# Altium PCB A.PcbDoc (part 1 of 3)
Units mm, origin at the board's own origin, x right, y up, seen from the top; angles counter-clockwise.
Board outline 93 x 60 mm, 2 copper layers (Top Layer, Bottom Layer); 76 components, 75 nets, 446 pads, 247 vias.
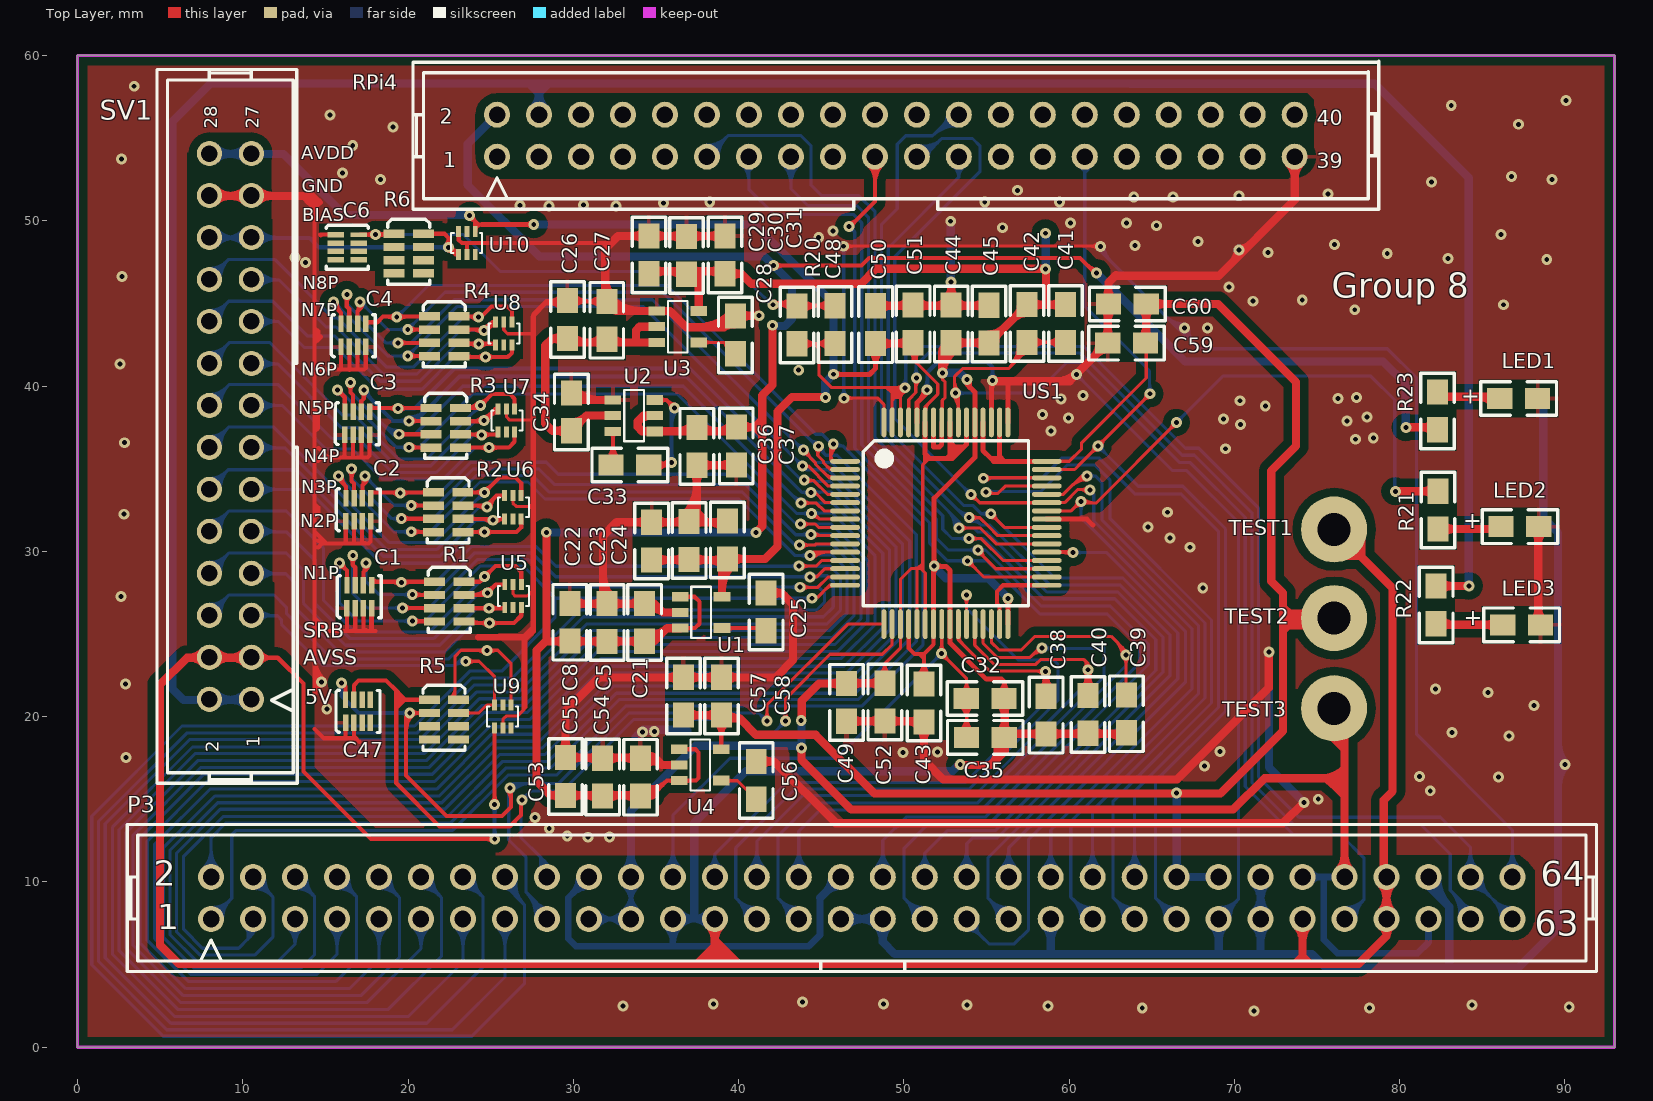
[diagram p0: Top Layer view]
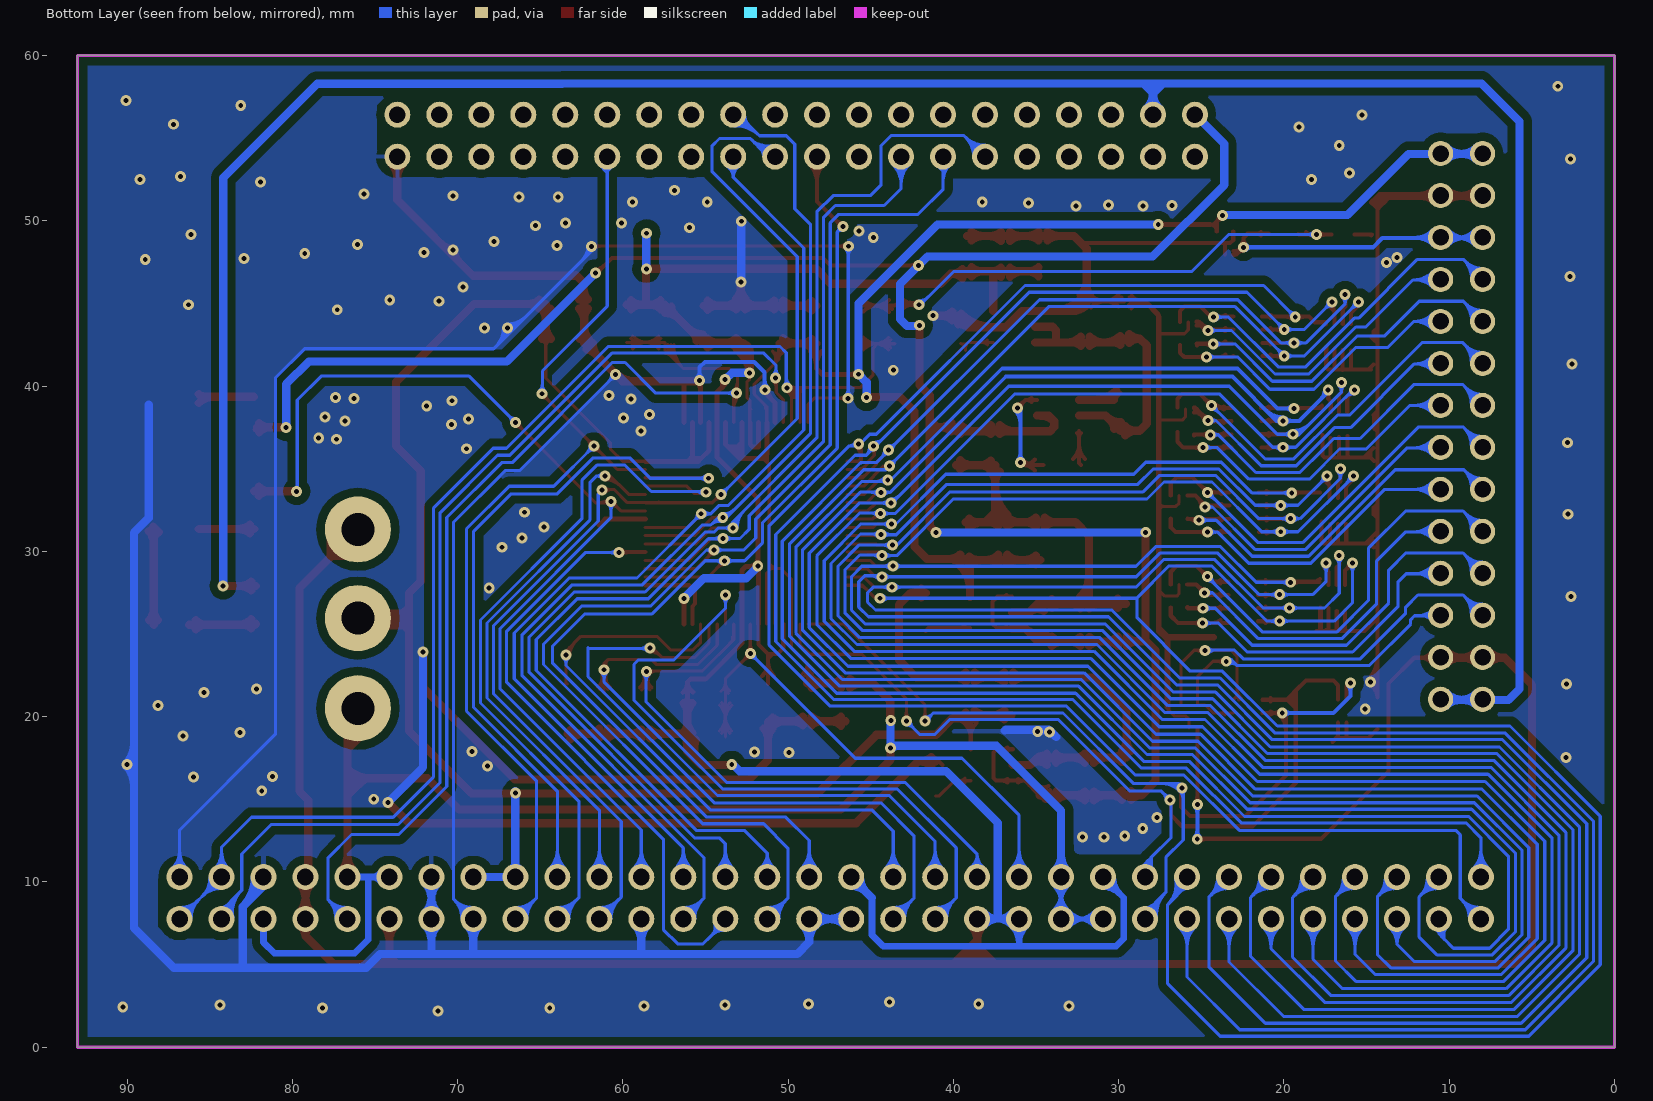
[diagram p1: Bottom Layer view, seen from below]

## Layer stack, top to bottom
Top Layer: signal copper 0.0356
Dielectric: dielectric 0.32, FR-4, Dk 4.8
Bottom Layer: signal copper 0.0356

## Board outline
0,0 93,0 93,60 0,60

## Design rules (kind name [scope] priority, off if disabled: settings)
Clearance Clearance_1 [inpolygon] p1: gap=0.5
Clearance [All] p2: gap=0.15
MinimumSolderMaskSliver [All] p1: minsoldermaskwidth=0.01
PolygonConnect PolygonConnect_1 [isvia] p1: connectstyle=Direct reliefconductorwidth=0.254 reliefentries=4 polygonreliefangle="90 Angle"
PolygonConnect [All] p2: connectstyle=Relief reliefconductorwidth=0.254 reliefentries=4 polygonreliefangle="90 Angle"
RoutingVias [All] p1: holewidth=0.3 width=0.66 viastyle="Through Hole" minholewidth=0.3 minwidth=0.66 maxholewidth=0.3 maxwidth=0.66
SilkToSilkClearance [All] p1: silktosilkclearance=0.01
SilkscreenOverComponentPads [All] p1: minsilkscreentomaskgap=0.01
SolderMaskExpansion [All] p1: expansion=0.102
Width [All] p1: maxlimit=1 minlimit=0.15 preferedwidth=0.254 minimp=50.000000 maximp=50.000000 favimp=50.000000
25 further rules are at their usual default settings.

## Components (designator, comment, footprint, x,y, rotation, side; value= is the part's Value field where it differs from the comment)
C1 "" "0805 ARRAY" 17.054,27.258 r270 top
C2 "" "0805 ARRAY" 16.988,32.516 r270 top locked
C3 "" "0805 ARRAY" 16.924,37.738 r270 top locked
C4 "" "0805 ARRAY" 16.695,43.062 r270 top
C5 "10uf" 0805 32.049,25.69 r90 top
C6 "" "0805 ARRAY" 16.329,48.401 r180 top
C8 "10uf" 0805 29.793,25.707 r90 top
C21 "1uf" 0805 34.321,25.698 r90 top
C22 "10uf" 0805 34.741,30.615 r90 top
C23 "2.2uf" 0805 37.011,30.655 r90 top
C24 "1uf" 0805 39.32,30.681 r90 top
C25 "1uf" 0805 41.671,26.333 r90 top
C26 "10uf" 0805 29.642,44.021 r90 top
C27 "2.2uf" 0805 32.026,43.977 r90 top
C28 "0.01uf" 0805 39.802,43.093 r90 top
C29 "10uf" 0805 34.574,47.935 r90 top
C30 "2.2uf" 0805 36.854,47.905 r90 top
C31 "1uf" 0805 39.179,47.935 r90 top
C32 "10uf" 0805 54.917,21.086 r0 top
C33 "10uf" 0805 33.419,35.218 r180 top
C34 "10uf" 0805 29.883,38.432 r90 top
C35 "0.1uf" 0805 54.927,18.743 r180 top
C36 "10uf" 0805 37.473,36.353 r270 top
C37 "1uf" 0805 39.861,36.372 r270 top
C38 "0.1uf" 0805 58.613,20.085 r270 top
C39 "1uf" 0805 63.459,20.168 r270 top
C40 "0.1uf" 0805 61.15,20.133 r270 top
C41 "0.1uf" 0805 59.783,43.78 r90 top
C42 "1uf" 0805 57.445,43.78 r90 top
C43 "0.1uf" 0805 51.212,20.82 r270 top
C44 "1uf" 0805 52.867,43.757 r90 top
C45 "0.1uf" 0805 55.146,43.745 r90 top
C47 "" "0805 ARRAY" 16.979,20.323 r270 top
C48 "1.5nF" 0805 45.833,43.718 r270 top
C49 "0.1uf" 0805 46.526,20.861 r270 top
C50 "1uf" 0805 48.295,43.709 r90 top
C51 "0.1uf" 0805 50.565,43.759 r90 top
C52 "1uf" 0805 48.85,20.873 r270 top
C53 "10uf" 0805 34.071,16.33 r90 top
C54 "10uf" 0805 31.779,16.337 r90 top
C55 "1uf" 0805 29.53,16.375 r90 top
C56 "1uf" 0805 41.07,16.139 r90 top
C57 "10uf" 0805 36.661,21.237 r90 top
C58 "2.2uf" 0805 38.975,21.237 r90 top
C59 "0.1uf" 0805 63.477,42.591 r0 top
C60 "1uf" 0805 63.521,44.958 r180 top
LED1 "" 0805 87.201,39.24 r0 top
LED2 "" 0805 87.273,31.489 r0 top
LED3 "" 0805 87.38,25.553 r0 top
P3 "64" 64 47.455,9.022 r0 top locked
R1 "" 8P4R 22.486,26.955 r180 top locked
R2 "" 8P4R 22.423,32.362 r180 top locked
R3 "" 8P4R 22.284,37.472 r180 top
R4 "" 8P4R 22.184,43.009 r180 top locked
R5 "" 8P4R 22.179,19.815 r180 top
R6 "" 8P4R 20.037,48.011 r180 top
R20 "1M" 0805 43.533,43.7 r90 top
R21 "10K" 0805 82.31,32.494 r90 top
R22 "10K" 0805 82.207,26.756 r90 top
R23 "10K" 0805 82.28,38.495 r270 top
RPi4 "RP13" 40 49.516,55.146 r0 top locked
SV1 "SV1" 26 9.254,38.827 r0 top locked
TEST1 "TEST2" P 76.036,31.322 r90 top
TEST2 "TEST3" P 76.036,25.957 r90 top
TEST3 "TEST4" P 76.036,20.501 r90 top
U1 "TPS73225DBVT" sot23-5 37.728,26.302 r0 top
U2 "LM2664M6" sot23-6 33.672,38.209 r0 top
U3 "TPS72325DBVT" sot23-5 36.318,43.589 r0 top
U4 "TPS73233DBVT" sot23-5 37.679,17.071 r0 top
U5 "TPD4E1B06DRLR" SOT563 26.353,27.298 r270 top
U6 "TPD4E1B06DRLR" SOT563 26.347,32.665 r270 top
U7 "TPD4E1B06DRLR" SOT563 25.955,37.916 r270 top
U8 "TPD4E1B06DRLR" SOT563 25.792,43.171 r270 top
U9 "TPD4E1B06DRLR" SOT563 25.739,20 r90 top
U10 "TPD4E1B06DRLR" SOT563 23.567,48.656 r90 top
US1 "LQFP64" TQFP64 52.543,31.696 r0 top locked (schematic designator US2)

## Footprints (in the part's own frame and the unit in brackets; to place one, negate y for a bottom-side part, rotate by r counter-clockwise, add the part's x,y. Pads: shape width x height; smd on the part's side, far side on the other; paste and mask are expansions set on the pad)
8P4R [mil]
  rect 50x20 smd: 1(-35,-47.24) 2(-35,-15.75) 3(-35,15.75) 4(-35,47.24) 5(35,47.24) 6(35,15.75) 7(35,-15.75) 8(35,-47.24)
  silkscreen extent -50,-82 50,73
26 [mil]
  round 60 hole 39.37: 0-1(-50,-700) 0-2(50,-700) 1(50,-600) 2(-50,-600) 3(50,-500) 4(-50,-500) 5(50,-400) 6(-50,-400) 7(50,-300) 8(-50,-300) 9(50,-200) 10(-50,-200) 11(50,-100) 12(-50,-100) 13(50,0) 14(-50,0) 15(50,100) 16(-50,100) 17(50,200) 18(-50,200) 19(50,300) 20(-50,300) 21(50,400) 22(-50,400) 23(50,500) 24(-50,500) 25(50,600) 26(-50,600)
  silkscreen extent -175,-900 159,800
40 [mil]
  round 62 hole 39.37: 1(-950,-50) 2(-950,50) 3(-850,-50) 4(-850,50) 5(-750,-50) 6(-750,50) 7(-650,-50) 8(-650,50) 9(-550,-50) 10(-550,50) 11(-450,-50) 12(-450,50) 13(-350,-50) 14(-350,50) 15(-250,-50) 16(-250,50) 17(-150,-50) 18(-150,50) 19(-50,-50) 20(-50,50) 21(50,-50) 22(50,50) 23(150,-50) 24(150,50) 25(250,-50) 26(250,50) 27(350,-50) 28(350,50) 29(450,-50) 30(450,50) 31(550,-50) 32(550,50) 33(650,-50) 34(650,50) 35(750,-50) 36(750,50) 37(850,-50) 38(850,50) 39(950,-50) 40(950,50)
  silkscreen extent -1150,-175 1150,177
64 [mil]
  round 62 hole 39.37: 1(-1550,-50) 2(-1550,50) 3(-1450,-50) 4(-1450,50) 5(-1350,-50) 6(-1350,50) 7(-1250,-50) 8(-1250,50) 9(-1150,-50) 10(-1150,50) 11(-1050,-50) 12(-1050,50) 13(-950,-50) 14(-950,50) 15(-850,-50) 16(-850,50) 17(-750,-50) 18(-750,50) 19(-650,-50) 20(-650,50) 21(-550,-50) 22(-550,50) 23(-450,-50) 24(-450,50) 25(-350,-50) 26(-350,50) 27(-250,-50) 28(-250,50) 29(-150,-50) 30(-150,50) 31(-50,-50) 32(-50,50) 33(50,-50) 34(50,50) 35(150,-50) 36(150,50) 37(250,-50) 38(250,50) 39(350,-50) 40(350,50) 41(450,-50) 42(450,50) 43(550,-50) 44(550,50) 45(650,-50) 46(650,50) 47(750,-50) 48(750,50) 49(850,-50) 50(850,50) 51(950,-50) 52(950,50) 53(1050,-50) 54(1050,50) 55(1150,-50) 56(1150,50) 57(1250,-50) 58(1250,50) 59(1350,-50) 60(1350,50) 61(1450,-50) 62(1450,50) 63(1550,-50) 64(1550,50)
  silkscreen extent -1750,-175 1750,175
0805 [mil]
  rect 60x50 smd: 1(-45,0) 2(45,0)
  silkscreen extent -90,-40 90,40
"0805 ARRAY" [mm]
  rect 1x0.3 smd: 1(-0.7,-0.75)
  rect 1x0.33 smd: 2(-0.7,-0.25) 3(-0.7,0.25) 4(-0.7,0.75) 5(0.7,0.75) 6(0.7,0.25) 7(0.7,-0.25) 8(0.7,-0.75)
  silkscreen extent -1.26,-1.33 1.28,1.33
P [mm]
  round 4 hole 2 mask+0.3: 1(0,0)
sot23-5 [mm]
  rect 1x0.55 smd: 1(-1.27,0.95) 2(-1.27,0) 3(-1.27,-0.95)
  rect 1x0.6 smd: 4(1.27,-0.95) 5(1.27,0.95)
  silkscreen extent -0.59,-1.55 0.6,1.55
sot23-6 [mm]
  rect 1x0.55 smd: 1(-1.27,0.95) 2(-1.27,0) 3(-1.27,-0.95) 5(1.27,0)
  rect 1x0.6 smd: 4(1.27,-0.95) 6(1.27,0.95)
  silkscreen extent -0.59,-1.55 0.6,1.55
SOT563 [mm]
  rect 0.67x0.3 smd: 1(-0.7,0.5) 2(-0.7,0) 3(-0.7,-0.5) 4(0.7,-0.5) 5(0.7,0) 6(0.7,0.5)
  silkscreen extent -0.6,-0.91 0.6,0.96
TQFP64 [mm]
  oval 1.8x0.3 smd mask+0.05: 1(-6.1,3.75) 2(-6.1,3.25) 3(-6.1,2.75) 4(-6.1,2.25) 5(-6.1,1.75) 6(-6.1,1.25) 7(-6.1,0.75) 8(-6.1,0.25) 9(-6.1,-0.25) 10(-6.1,-0.75) 11(-6.1,-1.25) 12(-6.1,-1.75) 13(-6.1,-2.25) 14(-6.1,-2.75) 15(-6.1,-3.25) 16(-6.1,-3.75) 33(6.1,-3.75) 34(6.1,-3.25) 35(6.1,-2.75) 36(6.1,-2.25) 37(6.1,-1.75) 38(6.1,-1.25) 39(6.1,-0.75) 40(6.1,-0.25) 41(6.1,0.25) 42(6.1,0.75) 43(6.1,1.25) 44(6.1,1.75) 45(6.1,2.25) 46(6.1,2.75) 47(6.1,3.25) 48(6.1,3.75)
  oval 0.3x1.8 smd mask+0.05: 17(-3.75,-6.1) 18(-3.25,-6.1) 19(-2.75,-6.1) 20(-2.25,-6.1) 21(-1.75,-6.1) 22(-1.25,-6.1) 23(-0.75,-6.1) 24(-0.25,-6.1) 25(0.25,-6.1) 26(0.75,-6.1) 27(1.25,-6.1) 28(1.75,-6.1) 29(2.25,-6.1) 30(2.75,-6.1) 31(3.25,-6.1) 32(3.75,-6.1) 49(3.75,6.1) 50(3.25,6.1) 51(2.75,6.1) 52(2.25,6.1) 53(1.75,6.1) 54(1.25,6.1) 55(0.75,6.1) 56(0.25,6.1) 57(-0.25,6.1) 58(-0.75,6.1) 59(-1.25,6.1) 60(-1.75,6.1) 61(-2.25,6.1) 62(-2.75,6.1) 63(-3.25,6.1) 64(-3.75,6.1)
  silkscreen extent -5,-5 5,5

## Part data
C1 C2 C3 C4 C6 C47 R1 R2 R3 R4 R5 R6: library part 8P4R
C5 C8 C21 C22 C23 C24 C25 C26 C27 C28 C29 C30 C31 C32 C33 C34 C35 C36 C37 C38 C39 C40 C41 C42 C43 C44 C45 C48 C49 C50 C51 C52 C53 C54 C55 C56 C57 C58 C59 C60: library part CAP, "Capacitor"
LED1 LED2 LED3: library part LED
R20 R21 R22 R23: library part RES1
RPi4: library part 40
SV1: library part 26
TEST1 TEST2 TEST3: library part CON1, "Connector"
U1 U3 U4: library part 5
U2: library part 6
U5 U6 U7 U8 U9 U10: library part 6+

## Via types
v1: diameter 0.66, hole 0.3, Top Layer to Bottom Layer, tented both sides, 247 vias

## Nets (pads, with @x,y where several pads share a name; then routed paths per layer and width w, separated by ;. In a path a pad name is that pad's centre, name@x,y a point inside that pad or via, vN(x,y) a via of type N, cw(c..) or ccw(c..) an arc to the next point about the centre after c; other vN are vias at no path point)
1N: R1.3 SV1.6 U5.4 | length 32.5
  Top Layer w0.25: R1.3@23.375,26.555 v1(24.906,26.555) U5.4@25.81,26.555 ; R1.3@23.847,26.464 cw(c24.067,26.243) 24.067,26.555 cw(c24.067,26.866) R1.3@23.847,26.646 ; v1@24.761,26.41 ccw(c24.411,26.06) 24.411,26.555 ccw(c24.411,27.05) v1@24.761,26.7 ; v1@25.051,26.41 cw(c25.401,26.06) 25.401,26.555 cw(c25.401,27.05) v1@25.051,26.7 ; 25.689,26.555 ccw(c25.689,26.762) U5.4@25.836,26.616 ; U5.4@25.799,26.544 U5.4@25.81,26.555 ; U5.4@25.817,26.555 U5.4@25.81,26.555 ; U5.4@25.853,26.598 U5.4@25.81,26.555
  Bottom Layer w0.19: SV1.6@7.903,28.638 9.161,29.895 12.629,29.895 13.671,28.853 13.671,26.86 16.215,24.316 21.924,24.316 24.163,26.555 v1(24.906,26.555) ; SV1.6@7.984,29.144 ccw(c7.984,30.17) 8.71,29.444 ; SV1.6@7.984,29.334 ccw(c7.984,30.819) 9.034,29.769 ; SV1.6@8.271,28.667 cw(c9.089,28.667) 8.511,29.245 ; SV1.6@8.461,28.667 cw(c9.738,28.667) 8.835,29.569 ; SV1.6@8.651,28.667 cw(c10.387,28.667) 9.16,29.894 ; v1@24.74,26.389 ccw(c24.339,25.988) 24.339,26.555 ccw(c24.339,27.122) v1@24.74,26.721
1P: R1.4 SV1.5 U5.6 | length 30.1
  Top Layer w0.25: R1.4@23.381,25.666 26.421,25.666 26.853,26.098 U5.6@26.853,26.598 ; R1.4@23.847,25.846 ccw(c24.281,26.28) 24.281,25.666 ; 24.401,25.666 cw(c24.401,25.121) v1@24.786,25.507 ; 24.472,25.666 ccw(c24.472,26.111) v1@24.786,25.797 ; v1@25.076,25.507 cw(c25.461,25.121) 25.461,25.666 ; v1@25.076,25.797 ccw(c25.391,26.111) 25.391,25.666
  Bottom Layer w0.19: SV1.5@10.443,28.638 12.6,28.638 13.108,28.13 13.108,26.646 15.845,23.909 22.219,23.909 23.962,25.652 v1(24.931,25.652) ; SV1.5@10.727,28.87 ccw(c11.287,29.429) 11.287,28.638 ; SV1.5@10.862,28.329 cw(c11.606,27.585) 11.606,28.638 ; SV1.5@10.862,29.004 ccw(c11.746,29.888) 11.746,28.638 ; SV1.5@10.996,28.195 cw(c12.065,27.126) 12.065,28.638 ; SV1.5@10.996,29.138 ccw(c12.204,30.347) 12.204,28.638 ; v1@24.765,25.485 ccw(c24.364,25.084) 24.364,25.652 ccw(c24.364,26.219) v1@24.765,25.818
2N: R1.1 SV1.8 U5.1 | length 36.1
  Top Layer w0.25: R1.1@23.375,28.155 24.326,28.155 ; R1.1@23.847,28.064 cw(c24.067,27.843) 24.067,28.155 cw(c24.067,28.466) R1.1@23.847,28.246 ; v1@24.43,28.444 cw(c24.071,28.41) 24.326,28.155 ; v1@24.615,28.259 ccw(c24.581,27.9) 24.326,28.155 ; v1@24.634,28.668 ccw(c24.634,29.163) 24.984,28.813 ccw(c25.334,28.463) v1@24.839,28.463 ; U5.1@26.853,27.998 26.853,28.756 26.496,29.113 25.284,29.113 v1(24.634,28.463) 24.326,28.155
  Bottom Layer w0.19: SV1.8@7.903,31.178 9.163,32.437 12.643,32.437 14.876,30.204 14.876,27.052 16.818,25.111 21.282,25.111 v1(24.634,28.463) ; SV1.8@7.984,31.684 ccw(c7.984,32.71) 8.71,31.984 ; SV1.8@7.984,31.874 ccw(c7.984,33.359) 9.034,32.309 ; SV1.8@8.271,31.207 cw(c9.089,31.207) 8.511,31.785 ; SV1.8@8.461,31.207 cw(c9.738,31.207) 8.835,32.109 ; SV1.8@8.651,31.207 cw(c10.387,31.207) 9.16,32.434 ; v1@24.399,28.463 cw(c23.831,28.463) 24.233,28.062 cw(c24.634,27.661) v1@24.634,28.228
2P: R1.2 SV1.7 U5.3 | length 30.1
  Top Layer w0.25: R1.2@23.375,27.355 24.665,27.355 v1(24.799,27.489) 25.308,27.998 U5.3@25.853,27.998 ; R1.2@23.847,27.264 cw(c24.067,27.043) 24.067,27.355 cw(c24.067,27.666) R1.2@23.847,27.446 ; R1.2@23.98,27.355 ccw(c23.98,28.309) v1@24.654,27.634 ; v1@24.799,27.694 ccw(c24.799,28.189) 25.149,27.839 ccw(c25.499,27.489) v1@25.004,27.489
  Bottom Layer w0.19: SV1.7@10.443,31.178 12.637,31.178 14.398,29.417 14.398,26.827 16.508,24.717 21.552,24.717 24.324,27.489 ; SV1.7@10.727,31.41 ccw(c11.287,31.969) 11.287,31.178 ; SV1.7@10.862,30.869 cw(c11.606,30.125) 11.606,31.178 ; SV1.7@10.862,31.544 ccw(c11.746,32.428) 11.746,31.178 ; SV1.7@10.996,30.735 cw(c12.065,29.666) 12.065,31.178 ; SV1.7@10.996,31.678 ccw(c12.204,32.887) 12.204,31.178 ; v1@24.612,27.347 ccw(c24.324,27.126) 24.324,27.489 ; v1@24.612,27.632 cw(c24.324,27.852) 24.324,27.489 ; v1(24.799,27.489) 24.324,27.489
3N: R2.3 SV1.10 U6.4 | length 30.2
  Top Layer w0.25: R2.3@23.312,31.962 25.844,31.962 U6.4@25.847,31.965 ; R2.3@23.784,31.871 cw(c24.005,31.651) 24.005,31.962 cw(c24.005,32.274) R2.3@23.784,32.053 ; 24.439,31.962 cw(c24.439,31.184) v1@24.989,31.734 ; v1@25.279,31.734 cw(c25.829,31.184) U6.4@25.829,31.962
  Bottom Layer w0.19: SV1.10@7.903,33.718 9.117,34.932 13.276,34.932 18.51,29.698 21.923,29.698 24.105,31.879 v1(25.134,31.879) ; SV1.10@7.984,34.224 ccw(c7.984,35.25) 8.71,34.524 ; SV1.10@7.984,34.414 ccw(c7.984,35.899) 9.034,34.849 ; SV1.10@8.461,33.759 cw(c9.634,33.789) 8.804,34.619 ; SV1.10@8.651,33.764 cw(c10.244,33.805) 9.117,34.932 ; v1@24.968,31.713 ccw(c24.567,31.312) 24.567,31.879 ccw(c24.567,32.447) v1@24.968,32.045
3P: R2.4 SV1.9 U6.6 | length 28.2
  Top Layer w0.25: R2.4@23.312,31.162 v1(24.632,31.162) 26.567,31.162 26.847,31.443 U6.6@26.847,31.965 ; R2.4@23.784,31.071 cw(c24.005,30.851) 24.005,31.162 cw(c24.005,31.474) R2.4@23.784,31.253 ; v1@24.487,31.017 ccw(c24.137,30.667) 24.137,31.162 ccw(c24.137,31.657) v1@24.487,31.307 ; v1@24.777,31.017 cw(c25.127,30.667) 25.127,31.162 cw(c25.127,31.657) v1@24.777,31.307
  Bottom Layer w0.19: SV1.9@10.524,33.747 13.903,33.747 18.372,29.278 22.133,29.278 24.017,31.162 v1(24.632,31.162) ; SV1.9@10.862,33.409 cw(c11.676,32.595) 11.676,33.747 cw(c11.676,34.898) SV1.9@10.862,34.084 ; SV1.9@10.996,33.275 cw(c12.135,32.136) 12.135,33.747 cw(c12.135,35.357) SV1.9@10.996,34.218 ; v1@24.466,30.996 ccw(c24.065,30.595) 24.065,31.162 ccw(c24.065,31.729) v1@24.466,31.328
4CSI: P3.39 RPi4.24 US1.39 | length 85.8
  Top Layer w0.19: v1@54.067,32.029 54.594,32.029 55.126,31.496 55.676,30.946 US1.39@58.643,30.946 ; v1@54.121,31.871 cw(c54.501,31.49) 54.501,32.029 ; v1@54.121,32.203 ccw(c54.543,32.625) 54.543,32.029
  Bottom Layer w0.19: 52.034,55.437 cw(c53.193,54.278) RPi4.24@53.295,55.914 ; 52.332,55.735 cw(c53.228,54.839) RPi4.24@53.306,56.104 ; 52.366,55.769 ccw(c51.719,56.416) RPi4.24@52.633,56.416 ; 52.629,56.033 cw(c53.263,55.4) RPi4.24@53.318,56.294 ; 53.186,32.591 ccw(c53.955,33.36) v1@53.955,32.272 ; RPi4.24@53.283,55.725 ccw(c53.158,53.717) 51.736,55.139 ; RPi4.24@53.326,56.416 53.012,56.416 51.736,55.139 ; 53.51,32.266 ccw(c53.955,32.711) v1@53.955,32.082 ; v1@53.963,31.993 cw(c54.062,31.472) 54.437,31.847 ; v1@53.999,31.806 cw(c54.143,31.045) 54.691,31.593 ; P3.39@55.652,7.752 ccw(c53.981,7.752) 55.163,8.934 ccw(c56.345,10.116) P3.39@56.345,8.445 ; P3.39@55.842,7.752 ccw(c54.63,7.752) 55.487,8.61 ccw(c56.345,9.468) P3.39@56.345,8.255 ; P3.39@56.345,7.752 55.091,9.006 55.091,11.459 66.093,22.461 66.093,24.947 63.07,27.97 58.818,27.97 55.196,31.593 54.691,31.593 ; 51.736,55.139 50.111,55.139 49.599,54.627 49.599,50.726 48.656,49.783 48.656,37.12 53.739,32.037 v1(53.955,32.037) 54.246,32.037 54.691,31.593
4N: R2.1 SV1.12 U6.1 | length 34.1
  Top Layer w0.25: R2.1@23.312,33.562 v1(24.62,33.562) 25.528,34.47 26.515,34.47 26.847,34.138 U6.1@26.847,33.365 ; R2.1@23.784,33.471 cw(c24.005,33.251) 24.005,33.562 cw(c24.005,33.874) R2.1@23.784,33.653 ; v1@24.475,33.417 ccw(c24.125,33.067) 24.125,33.562 ccw(c24.125,34.057) v1@24.475,33.707 ; v1@24.62,33.767 ccw(c24.62,34.262) 24.97,33.912 ccw(c25.32,33.562) v1@24.825,33.562
  Bottom Layer w0.19: SV1.12@7.903,36.258 9.173,37.527 11.856,37.527 13.849,35.534 18.846,30.538 21.596,30.538 v1(24.62,33.562) ; SV1.12@7.984,36.764 ccw(c7.984,37.79) 8.71,37.064 ; SV1.12@7.984,36.954 ccw(c7.984,38.439) 9.034,37.389 ; SV1.12@8.271,36.287 cw(c9.089,36.287) 8.511,36.865 ; SV1.12@8.461,36.287 cw(c9.738,36.287) 8.835,37.189 ; SV1.12@8.651,36.287 cw(c10.387,36.287) 9.16,37.514 ; v1@24.385,33.562 cw(c23.818,33.562) 24.219,33.161 cw(c24.62,32.76) v1@24.62,33.327
4P: R2.2 SV1.11 U6.3 | length 28
  Top Layer w0.25: R2.2@23.312,32.762 24.754,32.762 25.357,33.365 U6.3@25.847,33.365 ; R2.2@23.784,32.671 cw(c24.005,32.451) 24.005,32.762 cw(c24.005,33.074) R2.2@23.784,32.853 ; 24.106,32.762 cw(c24.106,31.998) v1@24.646,32.538 ; v1@24.996,32.683 cw(c25.771,32.683) 25.223,33.231
  Bottom Layer w0.19: SV1.11@10.443,36.258 12.539,36.258 14.532,34.265 18.679,30.118 21.759,30.118 24.325,32.683 ; SV1.11@10.727,36.49 ccw(c11.287,37.049) 11.287,36.258 ; SV1.11@10.862,35.949 cw(c11.606,35.205) 11.606,36.258 ; SV1.11@10.862,36.624 ccw(c11.746,37.508) 11.746,36.258 ; SV1.11@10.996,35.815 cw(c12.065,34.746) 12.065,36.258 ; SV1.11@10.996,36.758 ccw(c12.204,37.967) 12.204,36.258 ; v1@24.602,32.544 ccw(c24.325,32.339) 24.325,32.683 ; v1@24.602,32.823 cw(c24.325,33.028) 24.325,32.683 ; v1(24.791,32.683) 24.325,32.683
5N: R3.3 SV1.14 U7.4 | length 30.4
  Top Layer w0.25: R3.3@23.173,37.072 U7.4@25.456,37.072 ; R3.3@23.645,36.98 cw(c23.865,36.76) 23.865,37.072 cw(c23.865,37.383) R3.3@23.645,37.163 ; 23.907,37.072 cw(c23.907,36.495) v1@24.315,36.903 ; 24.023,37.072 ccw(c24.023,37.484) v1@24.315,37.193 ; v1@24.605,36.903 cw(c25.013,36.495) 25.013,37.072 ; v1@24.605,37.193 ccw(c24.897,37.484) 24.897,37.072 ; 25.296,37.072 cw(c25.296,36.872) U7.4@25.437,37.013
  Bottom Layer w0.19: SV1.14@7.903,38.798 9.202,40.096 12.124,40.096 15.394,36.826 16.982,36.826 17.663,36.146 19.04,34.769 21.698,34.769 23.977,37.048 ; SV1.14@7.984,39.304 ccw(c7.984,40.33) 8.71,39.604 ; SV1.14@7.984,39.494 ccw(c7.984,40.979) 9.034,39.929 ; SV1.14@8.271,38.827 cw(c9.089,38.827) 8.511,39.405 ; SV1.14@8.461,38.827 cw(c9.738,38.827) 8.835,39.729 ; SV1.14@8.651,38.827 cw(c10.387,38.827) 9.16,40.054 ; v1@24.275,36.902 ccw(c23.977,36.668) 23.977,37.048 ; v1@24.275,37.193 cw(c23.977,37.427) 23.977,37.048 ; v1(24.46,37.048) 23.977,37.048
5P: R3.4 SV1.13 U7.6 | length 28.3
  Top Layer w0.25: R3.4@23.173,36.272 v1(24.909,36.272) 26.098,36.272 26.454,36.628 U7.6@26.455,37.216 ; R3.4@23.645,36.18 cw(c23.865,35.96) 23.865,36.272 cw(c23.865,36.583) R3.4@23.645,36.363 ; v1@24.764,36.127 ccw(c24.414,35.777) 24.414,36.272 ccw(c24.414,36.767) v1@24.764,36.417 ; v1@25.054,36.127 cw(c25.404,35.777) 25.404,36.272 cw(c25.404,36.767) v1@25.054,36.417
  Bottom Layer w0.19: SV1.13@10.524,38.827 12.374,38.827 15.016,36.185 16.643,36.185 18.46,34.369 22.126,34.369 24.029,36.272 v1(24.909,36.272) ; SV1.13@10.862,38.489 cw(c11.676,37.675) 11.676,38.827 cw(c11.676,39.978) SV1.13@10.862,39.164 ; SV1.13@10.996,38.355 cw(c12.135,37.216) 12.135,38.827 cw(c12.135,40.437) SV1.13@10.996,39.298 ; v1@24.742,36.105 ccw(c24.341,35.704) 24.341,36.272 ccw(c24.341,36.839) v1@24.742,36.438
6N: R3.1 SV1.16 U7.1 | length 33.5
  Top Layer w0.25: R3.1@23.173,38.672 24.13,38.672 24.327,38.869 24.444,38.869 25.094,39.518 26.165,39.518 26.454,39.229 U7.1@26.454,38.707 ; R3.1@23.519,38.672 ccw(c23.519,39.68) v1@24.232,38.967 ; R3.1@23.645,38.58 cw(c23.865,38.36) 23.865,38.672 cw(c23.865,38.983) R3.1@23.645,38.763 ; v1@24.377,39.027 ccw(c24.377,39.572) 24.762,39.187 ; v1@24.582,38.822 cw(c25.027,38.822) 24.712,39.137
  Bottom Layer w0.19: SV1.16@7.903,41.338 9.188,42.623 11.65,42.623 16.024,38.248 16.744,38.248 19.401,35.591 21.146,35.591 v1(24.377,38.822) ; SV1.16@7.984,41.844 ccw(c7.984,42.87) 8.71,42.144 ; SV1.16@7.984,42.034 ccw(c7.984,43.519) 9.034,42.469 ; SV1.16@8.271,41.367 cw(c9.089,41.367) 8.511,41.945 ; SV1.16@8.461,41.367 cw(c9.738,41.367) 8.835,42.269 ; SV1.16@8.651,41.367 cw(c10.387,41.367) 9.16,42.594 ; v1@24.142,38.822 cw(c23.575,38.822) 23.976,38.421 cw(c24.377,38.02) v1@24.377,38.587
6P: R3.2 SV1.15 U7.3 | length 28.9
  Top Layer w0.25: R3.2@23.173,37.872 24.542,37.872 25.377,38.707 U7.3@25.454,38.707 ; R3.2@23.645,37.78 cw(c23.865,37.56) 23.865,37.872 cw(c23.865,38.183) R3.2@23.645,37.963 ; 23.99,37.872 ccw(c23.99,38.512) v1@24.443,38.059 ; 24.195,37.872 cw(c24.195,37.522) v1@24.443,37.769 ; v1@24.588,38.119 ccw(c24.588,38.606) 24.932,38.262 ; v1@24.786,37.861 cw(c25.539,37.659) 25.149,38.335 ; v1@24.793,37.914 cw(c25.296,37.914) 24.94,38.27 ; v1@24.807,38.137 cw(c25.455,37.49) U7.3@25.455,38.406 ; 25.234,38.564 cw(c25.455,38.343) U7.3@25.455,38.656
  Bottom Layer w0.19: SV1.15@10.443,41.338 12.112,41.338 ; SV1.15@10.862,41.029 cw(c11.606,40.285) 11.606,41.338 ; SV1.15@10.875,41.69 ccw(c11.678,42.43) 11.678,41.338 ; SV1.15@10.996,40.895 cw(c12.065,39.826) 12.065,41.338 ; SV1.15@11.015,41.819 ccw(c12.112,42.829) 12.112,41.338 ; v1@24.401,37.771 ccw(c24.111,37.549) 24.111,37.914 ; v1@24.401,38.057 cw(c24.111,38.279) 24.111,37.914 ; v1(24.588,37.914) 24.111,37.914 ; 12.112,41.338 15.967,37.483 16.952,37.483 19.258,35.176 21.373,35.176 24.111,37.914
7N: R4.3 SV1.18 U8.4 | length 30
  Top Layer w0.25: R4.3@23.139,42.557 U8.4@25.275,42.557 ; R4.3@23.545,42.701 ccw(c23.893,43.048) 23.893,42.557 ; 23.748,42.557 cw(c23.748,42.008) v1@24.136,42.396 ; 23.824,42.557 ccw(c23.824,42.998) v1@24.136,42.686 ; v1@24.426,42.396 cw(c24.814,42.008) 24.814,42.557 ; v1@24.426,42.686 ccw(c24.738,42.998) 24.738,42.557 ; 25.024,42.557 cw(c25.024,42.203) U8.4@25.274,42.453
  Bottom Layer w0.19: SV1.18@7.903,43.878 9.154,45.128 ; SV1.18@7.984,44.384 ccw(c7.984,45.41) 8.71,44.684 ; SV1.18@7.984,44.574 ccw(c7.984,46.059) 9.034,45.009 ; SV1.18@8.271,43.908 cw(c9.08,43.91) 8.508,44.482 ; SV1.18@8.461,43.908 cw(c9.723,43.913) 8.831,44.805 ; SV1.18@8.651,43.909 cw(c10.366,43.915) 9.154,45.128 ; v1@24.115,42.375 ccw(c23.714,41.974) 23.714,42.541 ccw(c23.714,43.108) v1@24.115,42.707 ; v1(24.281,42.541) 22.952,42.541 20.701,40.29 18.311,40.29 15.581,43.021 13.934,43.021 11.826,45.128 9.154,45.128
7P: R4.4 SV1.17 U8.6 | length 27.7
  Top Layer w0.25: R4.4@23.073,41.809 23.13,41.753 v1(24.688,41.753) 26.036,41.753 26.292,42.009 U8.6@26.292,42.471 ; R4.4@23.545,41.901 ccw(c23.902,42.257) 23.902,41.753 ; v1@24.543,41.608 ccw(c24.193,41.258) 24.193,41.753 ccw(c24.193,42.248) v1@24.543,41.898 ; v1@24.833,41.608 cw(c25.183,41.258) 25.183,41.753 cw(c25.183,42.248) v1@24.833,41.898
  Bottom Layer w0.19: SV1.17@10.524,43.907 12.159,43.907 13.74,42.325 15.67,42.325 18.188,39.808 20.851,39.808 22.797,41.753 v1(24.688,41.753) ; SV1.17@10.862,43.569 cw(c11.676,42.755) 11.676,43.907 cw(c11.676,45.058) SV1.17@10.862,44.244 ; SV1.17@10.996,43.435 cw(c12.135,42.296) 12.135,43.907 cw(c12.135,45.517) SV1.17@10.996,44.378 ; v1@24.522,41.587 ccw(c24.121,41.186) 24.121,41.753 ccw(c24.121,42.32) v1@24.522,41.919
8N: R4.1 SV1.20 U8.1 | length 32.2
  Top Layer w0.25: R4.1@23.073,44.209 24.449,44.209 25.041,44.801 26.018,44.801 26.292,44.527 U8.1@26.292,43.871 ; R4.1@23.545,44.118 cw(c23.766,43.898) 23.766,44.209 cw(c23.766,44.521) R4.1@23.545,44.301 ; R4.1@23.668,44.209 cw(c23.668,43.571) v1@24.12,44.022 ; 23.872,44.209 ccw(c23.872,44.561) v1@24.12,44.312
  Bottom Layer w0.19: SV1.20@7.903,46.418 9.151,47.665 11.926,47.665 15.486,44.105 15.739,44.105 18.686,41.158 20.347,41.158 23.356,44.167 v1(24.265,44.167) ; SV1.20@7.984,46.924 ccw(c7.984,47.95) 8.71,47.224 ; SV1.20@7.984,47.114 ccw(c7.984,48.599) 9.034,47.549 ; SV1.20@8.271,46.448 cw(c9.075,46.452) 8.507,47.021 ; SV1.20@8.461,46.449 cw(c9.716,46.456) 8.829,47.343 ; SV1.20@8.651,46.45 cw(c10.356,46.459) 9.151,47.665 ; v1@24.099,44.001 ccw(c23.698,43.6) 23.698,44.167 ccw(c23.698,44.735) v1@24.099,44.334
8P: R4.2 SV1.19 U8.3 | length 32.9
  Top Layer w0.25: R4.2@23.073,43.409 v1@24.64,43.409 ; R4.2@23.545,43.318 cw(c23.766,43.098) 23.766,43.409 cw(c23.766,43.721) R4.2@23.545,43.501 ; 23.996,43.409 cw(c23.996,42.749) v1@24.463,43.216 ; 24.23,43.409 ccw(c24.23,43.738) v1@24.463,43.506 ; v1@24.608,43.566 ccw(c24.608,44.022) 24.93,43.699 ; v1@24.661,43.559 ccw(c24.766,43.952) 24.97,43.6 ; v1@24.809,43.32 cw(c25.28,43.223) 25.039,43.64 ; v1@24.813,43.361 cw(c25.347,43.361) 24.969,43.738 ; 25.04,43.809 cw(c25.286,43.563) U8.3@25.302,43.911 ; U8.3@25.29,43.661 ccw(c25.249,42.8) v1@24.64,43.41 ; U8.3@25.292,43.871 25.102,43.871 v1@24.64,43.409
  Bottom Layer w0.19: SV1.19@10.443,46.418 11.337,46.418 ; SV1.19@10.727,46.649 ccw(c11.286,47.208) 11.286,46.418 ; SV1.19@10.801,46.953 11.337,46.418 ; SV1.19@10.862,46.109 cw(c11.606,45.365) 11.606,46.418 ; SV1.19@10.862,46.784 ccw(c11.745,47.666) 11.745,46.418 ; SV1.19@10.93,45.993 11.354,46.418 ; SV1.19@10.996,45.975 cw(c12.065,44.906) 12.065,46.418 ; SV1.19@10.996,46.918 ccw(c12.203,48.124) 12.203,46.418 ; v1@24.442,43.195 ccw(c24.041,42.794) 24.041,43.361 ccw(c24.041,43.928) v1@24.442,43.527 ; v1(24.608,43.361) 23.177,43.361 20.545,40.73 18.493,40.73 15.651,43.571 15.05,43.571 12.203,46.418 ; 11.337,46.418 cw(c11.337,46.573) 11.183,46.549 ccw(c11.337,46.573) 11.337,46.418 ; 11.337,46.418 ccw(c11.337,46.248) 11.172,46.288 cw(c11.337,46.248) 11.337,46.418 ; 11.337,46.418 11.354,46.418 ; 11.354,46.418 cw(c11.354,46.593) 11.181,46.563 ccw(c11.354,46.593) 11.354,46.418 ; 11.354,46.418 ccw(c11.354,46.226) 11.169,46.275 cw(c11.354,46.226) 11.354,46.418 ; 11.354,46.418 12.203,46.418
24: C32.1 C35.2 P3.24 US1.24 | length 47.2
  Top Layer w0.19: v1@52.12,23.983 ccw(c51.704,24.4) 52.293,24.4 ; v1@52.287,23.582 cw(c52.287,23.055) 52.659,23.428 ; v1(52.287,23.817) 52.293,23.823 US1.24@52.293,25.596 ; 52.293,24.369 ccw(c52.839,24.369) v1@52.453,23.983 ; v1@52.343,23.744 53.798,22.289 53.798,22.049 ; v1@52.522,23.817 ccw(c53.129,23.817) 52.7,23.388 ; C32.1@53.393,20.704 cw(c52.414,19.725) 53.798,19.725 ; C35.2@53.402,19.125 ccw(c52.445,20.081) 53.798,20.081 ; C32.1@53.51,21.557 ccw(c53.234,22.049) 53.798,22.049 ; C32.1@53.527,20.839 cw(c52.872,20.184) 53.798,20.184 ; C35.2@53.536,18.99 ccw(c52.904,19.623) 53.798,19.623 ; C32.1@53.603,21.391 ccw(c53.416,21.724) 53.798,21.724 ; C35.2@53.798,18.781 53.798,22.049 ; 53.798,19.553 ccw(c54.594,19.553) C35.2@54.031,18.99 ; 53.798,19.839 cw(c55.021,19.839) C32.1@54.156,20.704 ; 53.798,20.012 ccw(c55.053,20.012) C35.2@54.165,19.125 ; 53.798,20.298 cw(c54.562,20.298) C32.1@54.022,20.839 ; C32.1@54.073,21.536 cw(c54.413,22.049) 53.798,22.049
  Bottom Layer w0.19: P3.24@35.535,10.782 ccw(c34.353,11.964) 36.025,11.964 ccw(c37.696,11.964) P3.24@36.514,10.782 ; P3.24@35.67,10.648 ccw(c34.812,11.505) 36.025,11.505 ccw(c37.238,11.505) P3.24@36.38,10.648 ; P3.24@36.025,10.292 36.025,14.023 39.483,17.481 45.942,17.481 v1@52.442,23.981 ; 51.871,23.41 cw(c52.287,22.995) v1@52.287,23.582 ; 51.891,23.43 ccw(c51.504,23.817) v1@52.052,23.817
26: C38.1 P3.26 US1.26 | length 46.7
  Top Layer w0.19: US1.26@53.293,25.596 53.293,24.657 55.193,22.757 58.595,22.757 58.595,22.006 ; US1.26@53.348,24.846 ccw(c53.936,24.846) 53.52,24.43 ; 57.926,22.757 cw(c57.926,22.067) 58.414,22.555 cw(c57.976,22.117) 58.595,22.117 ; 58.099,22.757 ccw(c58.099,23.202) v1@58.414,22.887 ; C38.1@58.232,21.737 ccw(c57.355,22.614) v1@58.595,22.614 ; C38.1@58.366,21.603 ccw(c57.813,22.156) 58.595,22.156 ; v1@58.377,22.603 cw(c57.762,22.248) 58.448,22.065 ; v1@58.462,22.517 cw(c58.162,21.996) 58.743,22.152 ; C38.1@58.496,21.882 ccw(c58.468,22.006) 58.595,22.006 ; 58.5,22.26 cw(c58.909,22.15) v1@58.697,22.517 ; 58.595,22.19 cw(c59.111,22.19) v1@58.746,22.555 ; 58.595,22.245 ccw(c59.503,22.245) C38.1@58.861,21.603 ; v1@58.595,22.704 ccw(c59.962,22.704) C38.1@58.995,21.737 ; C38.1@58.696,21.889 cw(c58.714,22.006) 58.595,22.006 ; 58.73,22.199 cw(c59.245,22.337) v1@58.783,22.603
  Bottom Layer w0.19: P3.26@38.152,10.849 ccw(c37.545,11.668) 38.565,11.668 ; P3.26@38.266,10.696 ccw(c37.825,11.29) 38.565,11.29 ccw(c39.305,11.29) P3.26@38.864,10.696 ; P3.26@38.565,10.292 38.565,11.668 ; P3.26@38.977,10.849 cw(c39.584,11.668) 38.565,11.668 ; v1@58.414,22.555 cw(c57.976,22.117) 58.595,22.117 ; 58.595,22.19 cw(c59.111,22.19) v1@58.746,22.555 ; v1@58.595,22.688 58.595,20.883 53.726,16.014 42.911,16.014 38.565,11.668
  other v1: 58.58,22.721
27: P3.27 US1.27 | length 46
  Top Layer w0.19: v1@53.627,27.191 cw(c53.226,26.789) 53.793,26.789 cw(c54.36,26.789) v1@53.959,27.191 ; US1.27@53.793,25.596 v1(53.793,27.357) v1@53.797,27.361
  Bottom Layer w0.19: P3.27@40.412,7.752 ccw(c38.741,7.752) 39.923,8.934 ccw(c41.105,10.116) P3.27@41.105,8.445 ; P3.27@40.602,7.752 ccw(c39.39,7.752) 40.247,8.61 ccw(c41.105,9.468) P3.27@41.105,8.255 ; P3.27@41.105,7.752 39.832,9.025 39.832,12.053 43.398,15.619 53.96,15.619 59.325,20.984 59.325,23.161 59.066,23.42 56.92,23.42 53.793,26.547 v1(53.793,27.357) ; v1@53.627,27.191 cw(c53.226,26.789) 53.793,26.789 cw(c54.36,26.789) v1@53.959,27.191
28: C40.1 P3.28 US1.28 | length 50.9
  Top Layer w0.19: US1.28@54.293,25.145 US1.28@54.293,24.735 ; US1.28@54.293,25.596 US1.28@54.293,24.735 ; C40.1@60.768,21.785 ccw(c59.891,22.662) v1@61.131,22.662 ; C40.1@60.902,21.65 ccw(c60.349,22.203) 61.131,22.203 ; v1@60.933,22.714 cw(c60.325,22.364) 61.003,22.182 ; v1@60.945,22.968 ccw(c60.639,23.187) 60.905,23.452 ; v1@60.97,22.665 cw(c60.581,22.276) 61.131,22.276 ; v1@61.019,22.628 cw(c60.779,22.212) 61.242,22.337 ; v1@61.02,23.036 ccw(c60.913,23.226) 61.131,23.226 ; 61.052,22.365 cw(c61.47,22.252) v1@61.254,22.628 ; 61.063,23.294 cw(c60.824,23.054) v1@61.099,22.858 ; C40.1@61.131,21.424 61.131,23.226 ; 61.131,22.252 cw(c61.715,22.252) v1@61.302,22.665 ; 61.131,22.293 ccw(c62.039,22.293) C40.1@61.397,21.65 ; v1@61.131,22.751 ccw(c62.498,22.751) C40.1@61.531,21.785 ; v1@61.244,23.04 cw(c61.34,23.226) 61.131,23.226 ; 61.274,22.217 cw(c61.907,22.387) v1@61.34,22.714 ; US1.28@54.293,24.735 54.293,24.321 55.454,23.161 57.987,23.161 58.279,23.452 60.905,23.452 ; 60.905,23.452 61.131,23.226
  Bottom Layer w0.19: P3.28@40.615,10.782 ccw(c39.433,11.964) 41.105,11.964 ccw(c42.776,11.964) P3.28@41.594,10.782 ; P3.28@40.75,10.648 ccw(c39.892,11.505) 41.105,11.505 ccw(c42.318,11.505) P3.28@41.46,10.648 ; P3.28@41.105,10.292 41.105,12.444 43.884,15.224 54.278,15.224 61.136,22.081 v1(61.136,22.832) ; v1@60.97,22.665 cw(c60.569,22.264) 61.136,22.264 cw(c61.703,22.264) v1@61.302,22.665
29: P3.29 US1.29 | length 46.7
  Top Layer w0.19: US1.29@54.793,25.596 54.793,24.445 55.66,23.577 57.626,23.577 58.126,24.077 v1@58.381,24.077 ; 57.674,23.625 cw(c58.367,22.931) v1@58.367,23.912 ; 57.998,23.949 cw(c58.367,23.58) v1@58.367,24.102
  Bottom Layer w0.19: P3.29@42.952,7.752 ccw(c41.281,7.752) 42.463,8.934 ccw(c43.645,10.116) P3.29@43.645,8.445 ; P3.29@43.142,7.752 ccw(c41.93,7.752) 42.787,8.61 ccw(c43.645,9.468) P3.29@43.645,8.255 ; P3.29@43.645,7.752 42.378,9.019 42.378,12.769 44.386,14.777 54.475,14.777 62.112,22.414 62.112,24.167 62.055,24.11 v1@58.402,24.11 ; v1@58.533,23.981 cw(c58.845,23.669) 58.845,24.11 ; v1@58.533,24.313 ccw(c59.024,24.804) 59.024,24.11
  other v1: 58.367,24.147
30: C39.1 P3.30 US1.30 | length 47.4
  Top Layer w0.19: US1.30@55.293,25.596 55.293,24.5 55.766,24.027 57.108,24.027 57.936,24.855 62.539,24.855 63.44,23.954 v1(63.44,23.731) 63.44,22.089 ; 62.882,24.513 cw(c62.1,23.731) v1@63.205,23.731 ; 63.206,24.188 cw(c62.749,23.731) v1@63.395,23.731 ; v1@63.274,23.565 cw(c62.873,23.164) 63.44,23.164 cw(c64.008,23.164) v1@63.607,23.565 ; C39.1@63.341,21.965 ccw(c63.313,22.089) 63.44,22.089 ; C39.1@63.541,21.972 cw(c63.559,22.089) 63.44,22.089
  Bottom Layer w0.19: P3.30@43.155,10.782 ccw(c41.973,11.964) 43.645,11.964 ccw(c45.316,11.964) P3.30@44.134,10.782 ; P3.30@43.29,10.648 ccw(c42.432,11.505) 43.645,11.505 ccw(c44.858,11.505) P3.30@44,10.648 ; P3.30@43.645,10.292 43.645,13.071 44.912,14.338 54.685,14.338 63.44,23.094 v1(63.44,23.731) ; v1@63.274,23.565 cw(c62.873,23.164) 63.44,23.164 cw(c64.008,23.164) v1@63.607,23.565
37: P3.37 US1.37 | length 44.2
  Top Layer w0.25: US1.37@58.643,29.946 v1@60.017,29.946 ; 59.693,29.946 cw(c59.693,29.402) v1@60.078,29.787 ; 59.762,29.946 ccw(c59.762,30.392) v1@60.078,30.077
  Bottom Layer w0.19: P3.37@53.719,7.112 cw(c53.719,5.736) 54.691,6.709 ; P3.37@53.788,7.631 cw(c53.677,6.842) 54.447,7.048 ; P3.37@53.805,7.752 53.805,7.596 54.547,6.854 ; P3.37@53.877,7.255 cw(c53.945,6.788) 54.279,7.122 ; P3.37@53.904,7.067 cw(c54.012,6.319) 54.547,6.854 ; P3.37@54.262,7.545 ccw(c54.666,7.362) 54.353,7.048 ; P3.37@54.411,7.952 54.411,7.181 ccw(c54.875,7.181) 54.547,6.854 ; P3.37@54.435,7.466 ccw(c54.933,7.24) 54.547,6.854 ; v1@60.152,29.803 60.267,29.918 62.282,29.918 67.036,25.163 67.036,22.072 57.546,12.582 57.546,7.11 56.685,6.249 55.151,6.249 54.691,6.709 ; v1@60.389,29.766 cw(c60.756,29.398) 60.756,29.918 ; v1@60.389,30.098 ccw(c60.824,30.533) 60.824,29.918 ; 54.547,6.854 54.691,6.709
  other v1: 60.222,29.932
42: P3.42 R21.2 US1.42 | length 73.3
  Top Layer w0.19: US1.42@58.643,32.446 60.12,32.446 v1@60.598,32.924 ; 60.272,32.597 cw(c60.723,32.146) v1@60.723,32.784 ; 60.343,32.669 ccw(c59.992,33.019) v1@60.488,33.019 ; v1@60.668,33.096 v1@60.657,33.106 ; v1@60.691,33.017 v1@60.598,32.924 ; v1@60.755,33.051 ccw(c61.062,33.358) 61.062,32.924 ; v1@60.889,32.853 cw(c61.06,32.682) 61.06,32.924 ; v1@60.889,33.186 ccw(c61.521,33.817) 61.521,32.924 ; 66.072,37.353 ccw(c65.63,37.795) v1@66.255,37.795 ; 66.13,37.411 cw(c66.49,37.05) v1@66.49,37.56 ; v1@66.522,37.803 61.643,32.924 v1@60.598,32.924 ; R21.2@82.302,33.629 R21.2@82.31,33.637 ; v1@60.657,33.106 60.687,33.136 60.628,33.136 v1@60.657,33.106
  Top Layer w0.5: v1(79.736,33.629) R21.2@82.302,33.629 ; 81.36,33.629 ccw(c81.36,34.587) R21.2@82.038,33.91 ; 81.402,33.629 cw(c81.402,32.729) R21.2@82.038,33.365
  Bottom Layer w0.19: P3.42@58.395,10.782 ccw(c57.213,11.964) 58.885,11.964 ccw(c60.556,11.964) P3.42@59.374,10.782 ; P3.42@58.53,10.648 ccw(c57.672,11.505) 58.885,11.505 ccw(c60.098,11.505) P3.42@59.24,10.648 ; P3.42@58.885,10.292 58.885,13.137 67.431,21.683 67.431,25.322 60.723,32.03 v1(60.723,33.019) ; v1@60.557,32.853 cw(c60.156,32.452) 60.723,32.452 cw(c61.29,32.452) v1@60.889,32.853 ; v1@66.49,38.03 ccw(c66.49,38.616) 66.905,38.202 ; v1@66.601,37.739 66.601,37.898 69.301,40.598 78.252,40.598 79.699,39.152 79.699,33.657 79.736,33.619 v1(79.736,33.629) ; v1@66.725,37.795 cw(c67.273,37.795) 66.886,38.183
  other v1: 66.49,37.795
44: P3.44 US1.44 | length 40.7
  Top Layer w0.19: US1.44@58.643,33.446 59.642,33.446 60.752,34.557 ; 60.119,33.924 cw(c61.089,32.953) v1@61.089,34.326 ; 60.443,34.248 cw(c61.089,33.602) v1@61.089,34.516 ; v1@60.868,34.639 cw(c60.752,34.679) 60.752,34.557 ; v1@60.87,34.476 ccw(c60.752,34.43) 60.752,34.557 ; v1@61.215,34.557 60.752,34.557
  Bottom Layer w0.19: P3.44@60.935,10.782 ccw(c59.753,11.964) 61.425,11.964 ccw(c63.096,11.964) P3.44@61.914,10.782 ; P3.44@61.07,10.648 ccw(c60.212,11.505) 61.425,11.505 ccw(c62.638,11.505) P3.44@61.78,10.648 ; v1(61.089,34.561) 61.588,34.561 ; v1@61.271,34.411 cw(c61.588,34.15) 61.588,34.561 ; v1@61.271,34.71 ccw(c61.588,34.971) 61.588,34.561 ; P3.44@61.425,10.292 61.425,14.328 68.219,21.123 68.219,25.665 61.997,31.887 61.997,34.151 61.588,34.561
45: P3.45 US1.45 | length 51.2
  Top Layer w0.19: v1@54.931,33.624 55.059,33.496 55.434,33.496 ; v1@54.994,33.746 55.09,33.746 55.272,33.563 ccw(c55.434,33.725) 55.434,33.496 ; v1@55.132,33.407 cw(c55.346,33.193) 55.346,33.496 ; v1@55.183,33.664 ccw(c55.434,33.768) 55.434,33.496 ; US1.45@58.643,33.946 56.138,33.946 55.688,33.496 55.434,33.496
  Bottom Layer w0.19: v1@54.869,33.62 58.277,33.62 59.873,35.217 61.574,35.217 62.468,34.323 62.468,31.988 68.614,25.842 68.614,20.818 62.646,14.85 62.646,9.071 P3.45@63.965,7.752 ; v1@55.132,33.407 cw(c55.646,32.893) 55.646,33.62 ; v1@55.132,33.74 ccw(c55.42,34.028) 55.42,33.62 ; P3.45@63.272,7.752 ccw(c61.601,7.752) 62.783,8.934 ccw(c63.965,10.116) P3.45@63.965,8.445 ; P3.45@63.462,7.752 ccw(c62.25,7.752) 63.107,8.61 ccw(c63.965,9.468) P3.45@63.965,8.255
  other v1: 54.966,33.574
46: P3.46 US1.46 | length 50.2
  Top Layer w0.19: v1@54.739,34.241 v1(54.806,34.419) ; v1@54.972,34.253 cw(c55.438,33.787) 55.438,34.446 ; v1@54.972,34.586 ccw(c55.308,34.922) 55.308,34.446 ; v1@55.081,34.419 v1(54.806,34.419) ; US1.46@58.643,34.446 54.833,34.446 v1(54.806,34.419)
  Bottom Layer w0.19: v1@54.806,34.417 58.354,34.417 59.585,35.648 61.791,35.648 63.967,33.472 66.763,33.472 69.031,31.205 69.031,20.547 63.965,15.481 P3.46@63.965,10.292 ; v1@54.972,34.253 cw(c55.368,33.857) 55.368,34.417 ; v1@54.972,34.586 ccw(c55.379,34.992) 55.379,34.417 ; P3.46@63.475,10.782 ccw(c62.293,11.964) 63.965,11.964 ccw(c65.636,11.964) P3.46@64.454,10.782 ; P3.46@63.61,10.648 ccw(c62.752,11.505) 63.965,11.505 ccw(c65.178,11.505) P3.46@64.32,10.648
55: C41.1 C42.1 P3.55 US1.55 | length 80.9
  Top Layer w0.19: v1@52.958,39.403 cw(c52.148,38.593) US1.55@53.293,38.593 ; v1@52.958,39.735 ccw(c52.675,40.018) 53.075,40.018 ; v1@53.075,39.612 53.075,40.583 53.546,41.054 56.332,41.054 ; 53.075,40.255 ccw(c53.809,40.255) v1@53.29,39.735 ; v1@53.092,39.537 cw(c52.607,39.052) 53.293,39.052 ; v1(53.124,39.569) 53.293,39.4 US1.55@53.293,37.796 ; 56.644,41.366 ccw(c55.553,42.458) C42.1@57.095,42.5 ; C42.1@56.906,42.495 cw(c54.946,42.441) 56.332,41.054 ; 56.956,41.679 ccw(c56.16,42.474) C42.1@57.285,42.506 ; 57.108,41.83 cw(c57.445,41.493) C42.1@57.445,41.97 ; C42.1@57.693,42.39 cw(c58.29,41.792) 58.29,42.637 cw(c58.29,43.482) C42.1@57.693,42.885 ; C42.1@57.827,42.255 cw(c58.749,41.333) 58.749,42.637 cw(c58.749,43.941) C42.1@57.827,43.019 ; C41.1@59.401,42.255 ccw(c58.479,41.333) 58.479,42.637 ccw(c58.479,43.941) C41.1@59.401,43.019 ; C41.1@59.535,42.39 ccw(c58.938,41.792) 58.938,42.637 ccw(c58.938,43.482) C41.1@59.535,42.885 ; C41.1@59.783,42.637 C42.1@57.445,42.637 57.445,42.168 56.332,41.054
  Bottom Layer w0.19: v1(53.124,39.569) 58.014,39.569 59.864,41.419 60.641,41.419 66.693,35.367 67.331,35.367 70.656,32.043 70.656,15.767 73.558,12.864 76.419,12.864 77.85,11.434 77.85,8.937 P3.55@76.665,7.752 ; v1@53.29,39.403 cw(c53.691,39.002) 53.691,39.569 cw(c53.691,40.137) v1@53.29,39.735 ; P3.55@76.665,8.255 ccw(c76.665,9.468) 77.522,8.61 ccw(c78.38,7.752) P3.55@77.167,7.752 ; P3.55@76.665,8.445 ccw(c76.665,10.116) 77.847,8.934 ccw(c79.029,7.752) P3.55@77.357,7.752
61: P3.61 US1.61 | length 70.7
  Top Layer w0.19: US1.61@50.293,37.796 50.293,39.175 50.722,39.604 50.722,40.462 v1(50.757,40.497) ; v1@50.59,40.331 cw(c50.274,40.014) 50.722,40.014 ; 50.722,39.845 cw(c51.408,39.845) v1@50.923,40.331
  Bottom Layer w0.19: v1@50.59,40.663 ccw(c50.253,41) 50.73,41 ; v1@50.73,40.369 50.73,41.243 51.477,41.99 60.666,41.99 66.846,35.81 67.582,35.81 71.057,32.335 71.057,16.012 73.599,13.47 81.275,13.47 83.056,11.688 83.056,9.494 ; 50.73,41.128 ccw(c51.388,41.128) v1@50.923,40.663 ; 83.324,9.227 cw(c82.161,8.064) P3.61@83.788,7.825 ; 83.591,8.96 cw(c82.627,7.996) P3.61@83.976,7.798 ; P3.61@83.6,7.853 ccw(c81.695,8.133) 83.056,9.494 ; 83.858,8.692 cw(c83.094,7.927) P3.61@84.164,7.77 ; 83.979,8.572 ccw(c84.285,8.877) P3.61@84.285,8.445 ; P3.61@84.285,7.752 84.285,8.266 83.056,9.494
62: C48.2 P3.62 P3.63 R20.1 US1.62 US1.63 | length 106.4
  Top Layer w0.19: R20.1@43.78,42.309 cw(c44.378,41.712) 44.378,42.557 cw(c44.378,43.402) R20.1@43.78,42.804 ; R20.1@43.816,42.351 cw(c44.219,42.059) 44.219,42.557 cw(c44.219,43.055) R20.1@43.816,42.762 ; R20.1@43.915,42.175 cw(c44.836,41.253) 44.836,42.557 cw(c44.836,43.861) R20.1@43.915,42.939 ; R20.1@43.97,42.24 cw(c44.592,41.789) 44.592,42.557 ; R20.1@43.97,42.874 ccw(c44.592,43.325) 44.592,42.557 ; 44.486,42.557 ccw(c44.486,43.921) C48.2@45.451,42.957 ; 44.572,42.557 cw(c44.572,41.314) C48.2@45.451,42.193 ; 44.945,42.557 ccw(c44.945,43.463) C48.2@45.585,42.822 ; 45.031,42.557 cw(c45.031,41.773) C48.2@45.585,42.327 ; C48.2@45.833,42.575 45.815,42.557 R20.1@43.533,42.557 44.592,42.557 ; US1.63@49.293,37.796 49.293,39.138 ; 49.537,39.903 ccw(c49.537,40.436) v1@49.913,40.059 ; 49.662,39.453 ccw(c49.221,39.893) v1@49.844,39.893 ; 49.718,39.508 cw(c50.079,39.147) v1@50.079,39.658 ; US1.62@49.793,37.796 49.793,39.306 ; 49.793,39.24 cw(c50.228,39.24) v1@50.131,39.664 ; 49.793,39.478 cw(c50.174,39.478) v1@50.089,39.849 ; v1@49.913,39.728 ccw(c49.49,39.306) 49.49,39.903 ; 44.592,42.557 44.861,42.288 44.861,40.672 45.629,39.903 48.967,39.903 ; 48.967,39.903 49.293,39.577 49.293,39.138 ; 48.967,39.903 49.489,39.903 ; 49.293,39.138 49.461,39.306 ; 49.461,39.306 49.515,39.306 ; 49.461,39.306 49.489,39.334 49.489,39.903 ; 49.489,39.903 50.113,39.903 49.793,39.584 ; 49.515,39.306 49.793,39.306 ; 49.515,39.306 49.793,39.584 ; 49.793,39.306 49.793,39.584 ; 49.793,39.584 cw(c49.991,39.386) 50.039,39.662 ccw(c49.991,39.385) 49.793,39.584 ; 49.793,39.584 ccw(c49.62,39.756) 49.854,39.826 cw(c49.62,39.756) 49.793,39.584
  Bottom Layer w0.19: v1@49.913,40.059 ccw(c49.431,40.541) 50.113,40.541 ; v1@50.113,39.903 50.113,42.012 50.49,42.389 60.888,42.389 67.042,36.235 67.841,36.235 71.448,32.629 71.448,16.364 73.902,13.91 82.472,13.91 84.285,12.097 84.285,11.78 ; 50.113,40.38 ccw(c50.566,40.38) v1@50.245,40.059 ; P3.62@83.763,10.647 ccw(c82.504,11.906) 84.285,11.906 ; P3.62@84.285,9.6 cw(c84.285,7.928) 85.467,9.11 cw(c86.649,10.292) P3.62@84.977,10.292 ; P3.62@84.285,9.79 cw(c84.285,8.577) 85.142,9.435 cw(c86,10.292) P3.62@84.787,10.292 ; P3.62@84.698,10.783 cw(c85.694,11.78) 84.285,11.78 ; P3.63@86.132,7.752 ccw(c84.461,7.752) 85.643,8.934 ccw(c86.825,10.116) P3.63@86.825,8.445 ; P3.63@86.322,7.752 ccw(c85.11,7.752) 85.967,8.61 ccw(c86.825,9.468) P3.63@86.825,8.255 ; P3.63@86.825,7.752 P3.62@84.285,10.292 84.285,11.78
  other v1: 50.079,39.893
+5V: R22.2 RPi4.4 SV1.0-1 SV1.0-2 | length 158.2
  Top Layer w0.5: R22.2@82.207,27.899 84.177,27.899 v1(84.186,27.908) ; R22.2@82.479,27.626 cw(c83.136,26.969) 83.136,27.899 cw(c83.136,28.828) R22.2@82.479,28.171
  Bottom Layer w0.5: SV1.0-1@8.346,20.685 cw(c9.123,19.908) 9.123,21.006 ; SV1.0-1@8.346,21.409 ccw(c9.318,22.38) 9.318,21.006 ; 9.191,21.006 ccw(c9.191,22.38) SV1.0-2@10.162,21.409 ; 9.386,21.006 cw(c9.386,19.908) SV1.0-2@10.162,20.685 ; SV1.0-2@10.524,21.047 10.484,21.006 6.412,21.006 5.749,21.67 5.749,56.016 8.041,58.308 27.318,58.308 ; RPi4.4@27.548,56.798 ccw(c26.658,57.701) 27.926,57.701 ; RPi4.4@27.926,56.416 27.926,57.701 ; RPi4.4@28.303,56.798 cw(c29.193,57.701) 27.926,57.701 ; v1(84.186,27.908) 84.186,52.597 78.487,58.296 63.668,58.296 63.656,58.308 28.508,58.308 ; 27.318,58.308 28.508,58.308 ; 27.318,58.308 27.926,57.701 ; 27.926,57.701 27.926,57.726 28.508,58.308
+5VUNREG: C5.1 C8.1 C21.1 C36.1 C37.1 C53.1 C54.1 C55.1 R23.2 RPi4.2 U1.1 U1.3 U2.4 U2.5 U4.1 U4.3 | length 189.2
  Top Layer w0.25: 28.376,24.639 28.387,24.627 28.468,24.546 ; C53.1@33.992,15.087 ccw(c34.257,15.843) 34.823,15.277 ; C53.1@34.075,15.323 ccw(c34.402,16.26) 35.104,15.558 ; C53.1@34.157,15.559 ccw(c34.548,16.676) 35.385,15.839 ; C53.1@34.24,15.795 ccw(c34.694,17.093) 35.666,16.121 ; 34.777,15.232 35.666,16.121 ; U4.3@36.077,16.015 ccw(c35.821,15.759) 35.821,16.121 ccw(c35.821,16.483) U4.3@36.077,16.227 ; U4.1@36.409,18.021 37.391,18.021 37.575,17.836 37.575,16.28 37.416,16.121 U4.3@36.409,16.121 35.666,16.121 ; U1.3@36.458,25.352 37.374,25.352 37.64,25.617 37.64,26.951 37.339,27.252 U1.1@36.458,27.252 ; U4.3@36.74,16.015 cw(c36.996,15.759) 36.996,16.121 cw(c36.996,16.483) U4.3@36.74,16.227 ; U4.1@36.74,17.915 cw(c36.996,17.659) 36.996,18.021 cw(c36.996,18.383) U4.1@36.74,18.127 ; U1.3@36.789,25.245 cw(c37.045,24.989) 37.045,25.352 cw(c37.045,25.714) U1.3@36.789,25.458 ; U1.1@36.789,27.145 cw(c37.045,26.889) 37.045,27.252 cw(c37.045,27.614) U1.1@36.789,27.358 ; C36.1@37.237,37.259 C36.1@37.473,37.496 ; C37.1@39.842,37.496 C37.1@39.861,37.515 ; v1(42.124,47.283) 47.438,47.283 47.904,47.75 60.667,47.75 61.572,46.846 61.659,46.846 v1(61.665,46.839) ; v1@42.269,47.139 cw(c42.619,46.789) 42.619,47.283 cw(c42.619,47.778) v1@42.269,47.428 ; 61.166,47.251 ccw(c61.665,47.75) v1@61.665,47.044 ; 61.377,47.04 cw(c61.176,46.839) v1@61.46,46.839 ; R23.2@82.13,37.502 R23.2@82.28,37.352
  Top Layer w0.5: 28.376,24.639 v1@28.376,31.14 ; 28.406,24.645 27.771,24.01 27.771,16.092 28.631,15.232 ; 28.468,24.546 34.878,24.546 35.683,25.352 ; 28.821,24.546 ccw(c28.821,25.535) C8.1@29.52,24.836 ; 28.905,24.546 cw(c28.905,23.676) C8.1@29.52,24.291 ; C55.1@29.251,14.966 ccw(c28.631,14.375) 28.631,15.232 ; C55.1@29.251,15.497 cw(c28.631,16.089) 28.631,15.232 ; C55.1@29.53,15.232 28.631,15.232 ; C55.1@29.802,14.96 cw(c30.459,14.302) 30.459,15.232 cw(c30.459,16.161) C55.1@29.802,15.504 ; C55.1@29.899,15.232 34.777,15.232 ; C8.1@30.065,24.291 cw(c30.68,23.676) 30.68,24.546 ; C8.1@30.065,24.836 ccw(c30.764,25.535) 30.764,24.546 ; 30.759,15.232 cw(c30.759,14.174) C54.1@31.507,14.922 ; 30.94,15.232 ccw(c30.94,16.033) C54.1@31.507,15.467 ; 31.117,24.546 ccw(c31.117,25.478) C5.1@31.776,24.819 ; 31.121,24.546 cw(c31.121,23.619) C5.1@31.776,24.275 ; C54.1@32.051,14.922 cw(c32.799,14.174) 32.799,15.232 ; C54.1@32.051,15.467 ccw(c32.618,16.033) 32.618,15.232 ; C5.1@32.321,24.275 cw(c32.976,23.619) 32.976,24.546 ; C5.1@32.321,24.819 ccw(c32.98,25.478) 32.98,24.546 ; 33.034,15.232 cw(c33.034,14.149) C53.1@33.799,14.915 ; 33.25,15.232 ccw(c33.25,16.008) C53.1@33.799,15.459 ; 33.37,24.546 ccw(c33.37,25.507) C21.1@34.049,24.828 ; 33.414,24.546 cw(c33.414,23.648) C21.1@34.049,24.283 ; C21.1@34.286,24.573 ccw(c34.532,25.342) 35.103,24.771 ; C53.1@34.372,15.427 ccw(c34.777,15.75) 34.777,15.232 ; C53.1@34.413,15.01 cw(c34.777,14.822) 34.777,15.232 ; C21.1@34.438,25.049 ccw(c34.812,26.222) 35.683,25.351 ; U2.5@34.715,38.184 ccw(c34.653,37.124) 33.902,37.875 ; U2.5@34.942,38.209 34.236,38.209 33.902,37.875 ; 36.28,37.259 ccw(c36.28,38.562) C36.1@37.201,37.641 ; U1.3@36.458,25.352 35.683,25.352 ; 36.808,37.259 cw(c36.808,36.703) C36.1@37.201,37.096 ; C36.1@37.237,37.259 U2.4@34.942,37.259 34.159,37.259 33.902,37.516 33.902,37.875 ; C36.1@37.433,37.267 C37.1@39.801,37.267 ; C36.1@37.746,37.096 cw(c38.157,36.685) 38.157,37.267 ; C36.1@37.746,37.641 ccw(c38.649,38.544) 38.649,37.267 ; 38.638,37.267 ccw(c38.638,38.611) C37.1@39.589,37.66 ; 39.225,37.267 cw(c39.225,36.752) C37.1@39.589,37.116 ; C37.1@39.861,37.515 40.982,37.515 ; C37.1@40.133,37.243 cw(c40.791,36.586) 40.791,37.515 cw(c40.791,38.445) C37.1@40.133,37.787 ; v1(41.058,31.139) 41.436,31.516 41.436,37.062 ; 41.288,37.515 40.982,37.515 ; 41.415,38.927 41.415,39.42 ; v1@42.055,43.645 42.055,40.06 41.415,39.42 ; v1(80.371,37.502) R23.2@82.13,37.502 ; 81.294,37.502 cw(c81.294,36.493) R23.2@82.008,37.207 ; 81.406,37.502 ccw(c81.406,38.352) R23.2@82.008,37.751 ; 40.982,37.515 41.436,37.969 ; 40.982,37.515 41.436,37.062 ; 41.415,39.42 41.436,39.399 41.436,37.969 ; 41.436,37.062 41.436,37.969
  Bottom Layer w0.5: RPi4.2@25.386,56.416 23.611,54.641 23.611,52.173 27.947,47.837 41.564,47.837 43.231,46.17 43.231,44.056 42.813,43.638 v1@42.098,43.638 ; v1@28.308,31.15 28.32,31.139 v1(41.058,31.139) ; v1(61.665,46.839) 67.022,41.483 78.998,41.483 80.371,40.11 v1(80.371,37.502)
  other v1: 28.365,31.15 42.06,43.674
-5VUNREG: C26.1 C27.1 C34.1 U2.2 U3.2 U3.3 | length 26.8
  Top Layer w0.5: C26.1@29.366,42.61 ccw(c28.731,41.992) 28.731,42.878 ; C26.1@29.366,43.147 cw(c28.731,43.764) 28.731,42.878 ; C34.1@29.611,37.016 ccw(c28.953,36.359) 28.953,37.289 ccw(c28.953,38.218) C34.1@29.611,37.561 ; C26.1@29.642,42.878 28.73,42.878 ; C26.1@29.881,42.639 U3.3@35.048,42.639 ; C34.1@29.883,37.801 ccw(c29.883,39.037) 30.757,38.163 ; C26.1@29.914,42.479 cw(c30.301,42.093) 30.301,42.639 ; C26.1@29.914,43.024 ccw(c30.842,43.951) 30.842,42.639 ; C34.1@30.268,37.416 cw(c30.891,37.416) C34.1@30.45,37.856 ; 30.934,42.639 ccw(c30.934,43.799) C27.1@31.754,42.979 ; 31.259,42.639 cw(c31.259,41.94) C27.1@31.754,42.434 ; C27.1@32.298,42.434 cw(c32.793,41.94) 32.793,42.639 ; C27.1@32.298,42.979 ccw(c33.118,43.799) 33.118,42.639 ; U2.2@32.402,38.209 30.804,38.209 C34.1@29.883,37.289 28.74,37.289 28.297,37.732 28.297,42.444 28.73,42.878 ; 33.795,42.691 33.795,43.371 34.013,43.589 U3.2@35.048,43.589